# Altium PCB PCB1.PcbDoc
Units mm, origin at the board's own origin, x right, y up, seen from the top; angles counter-clockwise.
Board outline 52.07 x 88.14 mm, 2 copper layers (Top Layer, Bottom Layer); 86 components, 40 nets, 258 pads, 102 vias.
Unrouted connection lines stored in the file: 1.
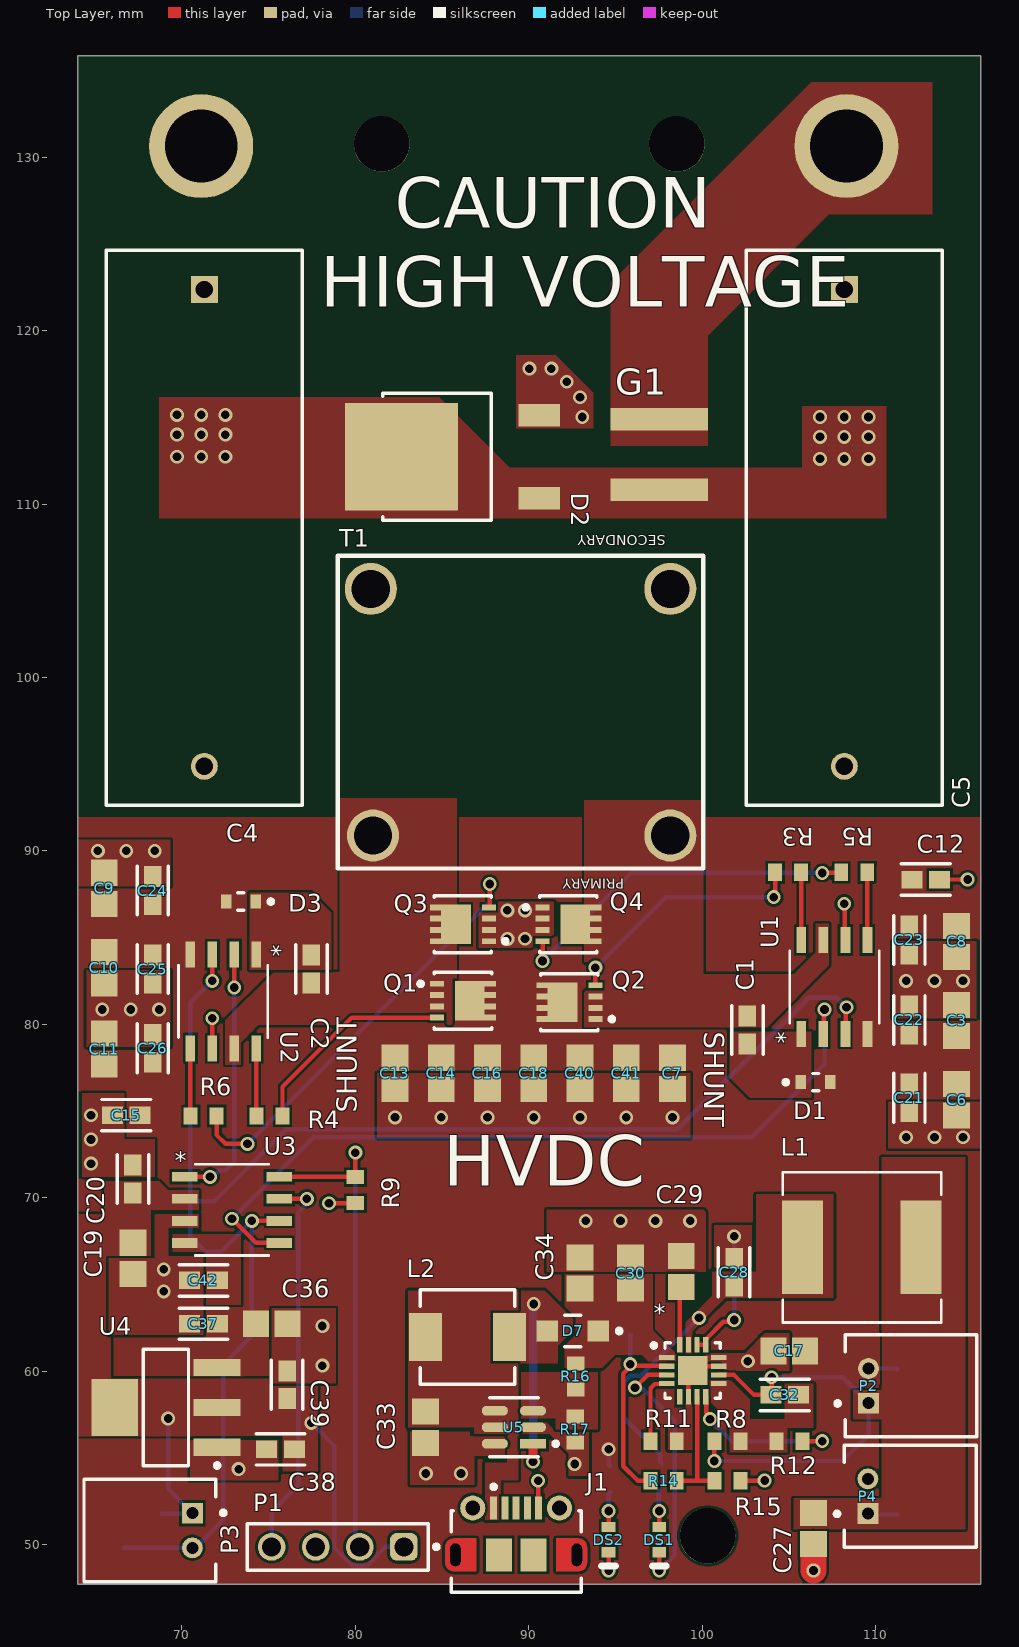
[diagram p0: Top Layer view]
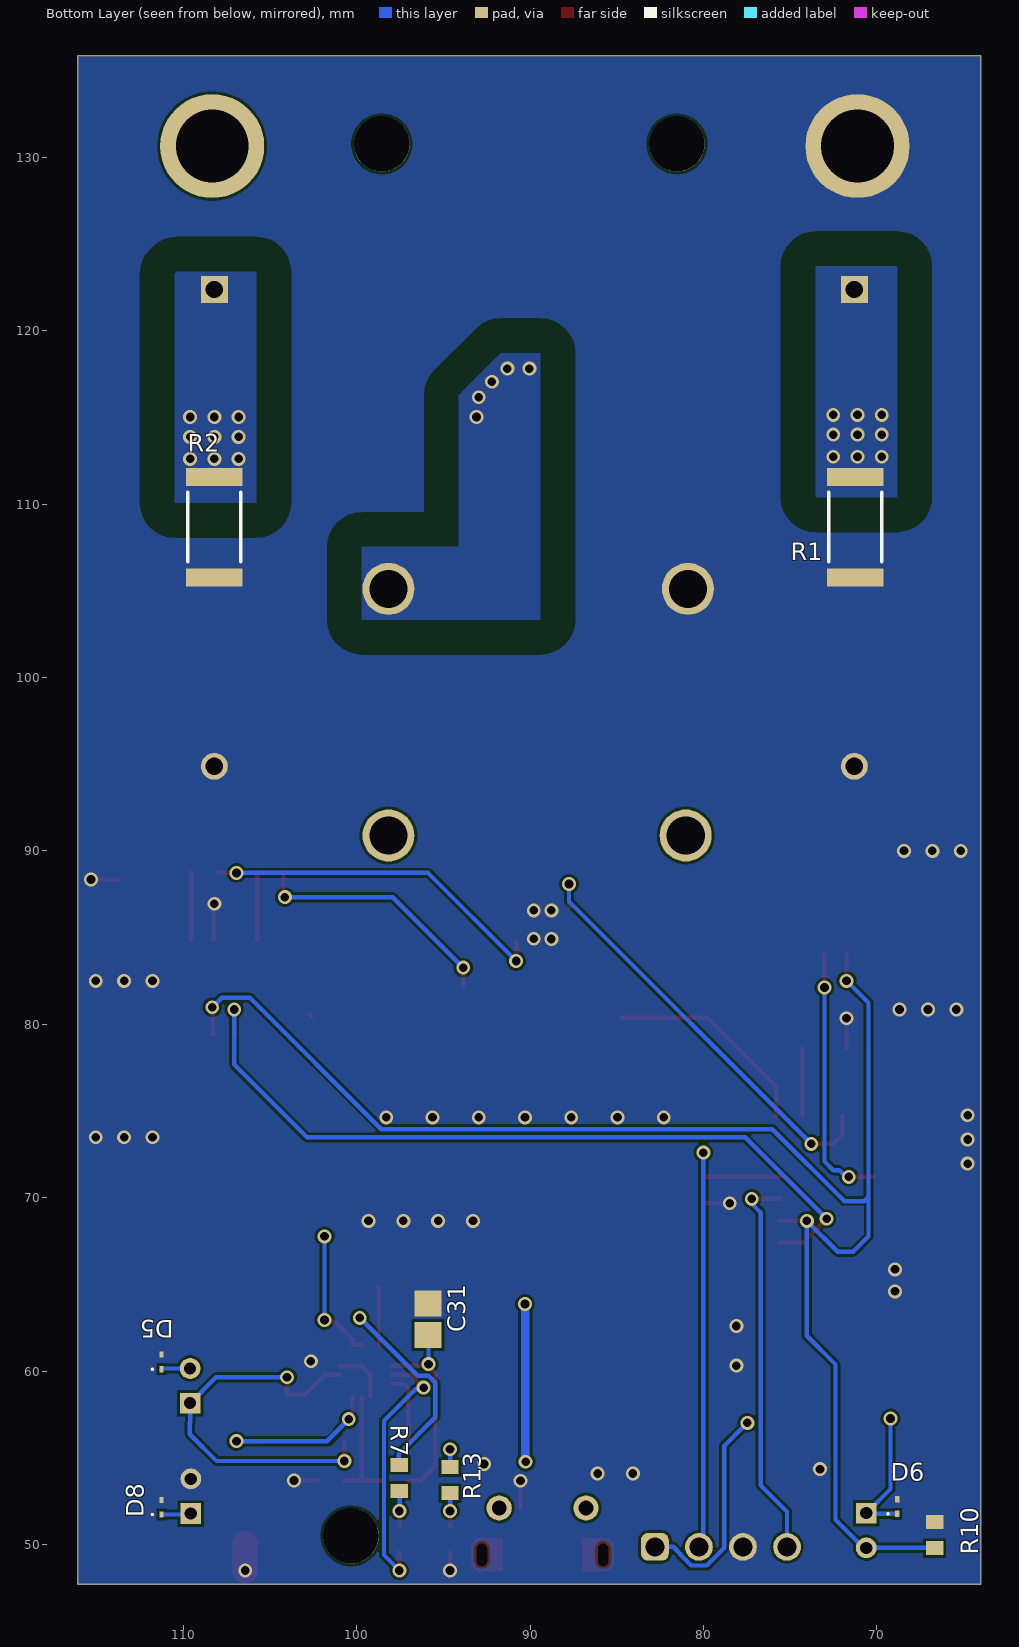
[diagram p1: Bottom Layer view, seen from below]

## Layer stack, top to bottom
Top Solder: solder mask 0.0102, Solder Resist, Dk 3.5
Top Layer: signal copper 0.0356
Dielectric 1: dielectric 0.32, FR-4, Dk 4.8
Bottom Layer: signal copper 0.0356
Bottom Solder: solder mask 0.0102, Solder Resist, Dk 3.5

## Board outline
64.008,47.713 116.078,47.713 116.078,135.851 64.008,135.851

## Design rules (kind name [scope] priority, off if disabled: settings)
Clearance Clearance_2 [InNet('NetC4_1') vs InNet('GND')] p1: gap=0.15 ignorepadtopadclearanceinfootprint=TRUE except(2: Poly-Poly)
Clearance Clearance_1 [InNet('NetD2_2') vs InNet('GND')] p2: gap=0.15 ignorepadtopadclearanceinfootprint=TRUE except(2: Poly-Poly)
Clearance [All] p3: gap=0.15 ignorepadtopadclearanceinfootprint=TRUE
HoleSize [All] p1: absolutevalues=TRUE maxlimit=10 minlimit=0.025 maxpercent=80.000 minpercent=20.000
MinimumSolderMaskSliver [All] p1: minsoldermaskwidth=0.1
PlaneClearance [InNet('NetD2_2')] p1: clearance=2
PlaneConnect [All] p1: planeconnectstyle=Direct reliefexpansion=0.508 reliefentries=4 reliefconductorwidth=0.254 reliefairgap=0.254
PolygonConnect [All] p1: connectstyle=Direct reliefconductorwidth=0.254 reliefentries=4 polygonreliefangle="90 Angle" airgapwidth=0.254
RoutingVias [All] p1: holewidth=0.5 width=0.8 viastyle="Through Hole" minholewidth=0.2 minwidth=0.4 maxholewidth=0.5 maxwidth=0.8
SilkToSolderMaskClearance [IsPad] p1: minsilkscreentomaskgap=0.1 clearancetoexposedcopper=TRUE
SolderMaskExpansion [All] p1: expansion=0 istentingtop=FALSE
SupplyNets "Schematic Supply Nets_5" [InNet('CHG_VBUS')] p1: voltage=0.000
SupplyNets "Schematic Supply Nets_3" [InNet('3V3')] p2: voltage=0.000
SupplyNets "Schematic Supply Nets_4" [InNet('VBAT_CONN')] p3: voltage=0.000
SupplyNets "Schematic Supply Nets_2" [InNet('GND')] p4: voltage=0.000
SupplyNets "Schematic Supply Nets_1" [InNet('VBUS')] p5: voltage=0.000
SupplyNets "Schematic Supply Nets" [InNet('VBAT')] p6: voltage=0.000
Width [All] p1: maxlimit=10 minlimit=0.1 preferedwidth=0.254 minimp=50.000000 maximp=50.000000 favimp=50.000000
25 further rules are at their usual default settings.

## Classes and differential pairs
component class Power: C33 C34 D7 L2 R16 R17 U5
component class STM32: * C19 C20 C27 C28 C29 C30 C31 C32 C36 C37 C38 C39 C42 D5 D6 D8 DS1 DS2 J1 L1 P1 P2 P3 P4 R7 R8 R9 R10 R11 R12 R13 R14 R15 U3 U4
component class "HV Section": C1 C2 C3 C4 C5 C6 C7 C8 C9 C10 C11 C12 C13 C14 C15 C16 C17 C18 C21 C22 C23 C24 C25 C26 C40 C41 D1 D2 D3 G1 Q1 Q2 Q3 Q4 R1 R2 R3 R4 R5 R6 T1 U1 U2

## Components (designator, comment, footprint, x,y, rotation, side; value= is the part's Value field where it differs from the comment)
* "BQ25306RTER" BQ25306RTER 99.465,60.036 r0 top
C1 "100n" FP-GRM188-0_1-e0_2_0_55-IPC_A 102.616,79.677 r90 top
C2 "100n" FP-GRM188-0_1-e0_2_0_55-IPC_A 77.47,83.19 r270 top
C3 "10u" CAPC2013X145X50ML20T25 114.681,80.225 r270 top
C4 "1u" FP-C4AQSBU4100A1WJ-MFG 71.301,108.63 r270 top
C5 "1u" FP-C4AQSBU4100A1WJ-MFG 108.207,108.63 r270 top
C6 "10u" CAPC2013X145X50ML20T25 114.681,75.653 r90 top
C7 "10u" CAPC2013X145X50ML20T25 98.298,77.177 r90 top
C8 "10u" CAPC2013X145X50ML20T25 114.681,84.786 r90 top
C9 "10u" CAPC2013X145X50ML20T25 65.532,87.845 r270 top
C10 "10u" CAPC2013X145X50ML20T25 65.532,83.273 r90 top
C11 "10u" CAPC2013X145X50ML20T25 65.532,78.574 r270 top
C12 "100n" FP-GRM188-0_1-e0_2_0_55-IPC_A 112.903,88.353 r0 top
C13 "10u" CAPC2013X145X50ML20T25 82.296,77.177 r90 top
C14 "10u" CAPC2013X145X50ML20T25 84.963,77.177 r90 top
C15 "100n" FP-GRM188-0_1-e0_2_0_55-IPC_A 66.802,74.764 r180 top
C16 "10u" CAPC2013X145X50ML20T25 87.63,77.177 r90 top
C17 "4u7" CAPC2013X145X50ML20T25 105.029,61.175 r0 top
C18 "10u" CAPC2013X145X50ML20T25 90.297,77.177 r90 top
C19 "4u7" CAPC2013X145X50ML20T25 67.183,66.509 r90 top
C20 "100n" FP-GRM188-0_1-e0_2_0_55-IPC_A 67.183,71.081 r90 top
C21 "100n" FP-GRM188-0_1-e0_2_0_55-IPC_A 111.952,75.773 r270 top
C22 "100n" FP-GRM188-0_1-e0_2_0_55-IPC_A 111.952,80.258 r90 top
C23 "100n" FP-GRM188-0_1-e0_2_0_55-IPC_A 111.952,84.87 r270 top
C24 "100n" FP-GRM188-0_1-e0_2_0_55-IPC_A 68.326,87.718 r90 top
C25 "100n" FP-GRM188-0_1-e0_2_0_55-IPC_A 68.326,83.19 r270 top
C26 "100n" FP-GRM188-0_1-e0_2_0_55-IPC_A 68.326,78.618 r90 top
C27 "10u" CAPC2013X145X50ML20T25 106.426,50.927 r90 top
C28 "100n" FP-GRM188-0_1-e0_2_0_55-IPC_A 101.854,65.707 r90 top
C29 "10u" CAPC2013X145X50ML20T25 98.806,65.758 r270 top
C30 "2u2" CAPC2013X145X50ML20T25 95.885,65.659 r270 top
C31 "2u2" CAPC2013X145X50ML20T25 95.885,62.992 r270 bottom
C32 "470pf" FP-GRM188-0_1-e0_2_0_55-IPC_A 104.775,58.635 r0 top
C33 "1u" CAPC2013X145X50ML20T25 84.062,56.769 r90 top
C34 "10u" CAPC2013X145X50ML20T25 92.964,65.659 r270 top
C36 "10u" CAPC2013X145X50ML20T25 75.184,62.738 r180 top
C37 "100n" FP-GRM188-0_1-e0_2_0_55-IPC_A 71.247,62.738 r180 top
C38 "100n" FP-GRM188-0_1-e0_2_0_55-IPC_A 75.692,55.499 r180 top
C39 "100n" FP-GRM188-0_1-e0_2_0_55-IPC_A 76.073,59.222 r90 top
C40 "10u" CAPC2013X145X50ML20T25 92.964,77.177 r90 top
C41 "10u" CAPC2013X145X50ML20T25 95.631,77.177 r90 top
C42 "100n" FP-GRM188-0_1-e0_2_0_55-IPC_A 71.247,65.239 r180 top
D1 "SD0603S040S0R2" FP-SD0603-MFG 106.553,76.669 r0 top
D2 "C4D08120E" FP-TO-252-2_v2-MFG 84.709,112.737 r90 top
D3 "SD0603S040S0R2" FP-SD0603-MFG 73.406,87.083 r180 top
D5 "ESD9R3.3ST5G" ONSC-SOD-923-2-514AB-01_V 111.252,60.54 r90 bottom
D6 "ESD9R3.3ST5G" ONSC-SOD-923-2-514AB-01_V 68.834,52.197 r90 bottom
D7 "MBR230LSFT1G" FP-498-MFG 92.548,62.322 r180 top
D8 "ESD9R3.3ST5G" ONSC-SOD-923-2-514AB-01_V 111.252,52.158 r90 bottom
DS1 "TLMS1000-GS08" VISH-TLMS1000_V 97.536,50.292 r270 top
DS2 "TLMS1000-GS08" VISH-TLMS1000_V 94.615,50.292 r270 top
G1 "GDT" 2039-110-SM-RPLF 97.536,110.832 r90 top
J1 "105017-0001" USB-MICRO-B_V 89.281,50.761 r0 top
L1 "ETQ-P4M1R0KVK" IND_PCC-M0840M-LP_PAN 109.22,67.144 r180 top
L2 "IHLP2020CZER3R3M11" FP-IHLP-2020CZ-FP_1_905x2-MFG 86.475,61.976 r0 top
P1 "61300411121" 61300411121 78.994,49.872 r180 top
P2 "S2B-PH-K-S(LF)(SN)" JST-S2B-PH-K-S_V 112.051,59.159 r90 top
P3 "S2B-PH-K-S(LF)(SN)" JST-S2B-PH-K-S_V 68.162,50.816 r270 top
P4 "S2B-PH-K-S(LF)(SN)" JST-S2B-PH-K-S_V 112.014,52.793 r90 top
Q1 "BSZ110N06NS3 G" INF-PG-TSDSON-8-21_V 86.219,81.368 r180 top
Q2 "BSZ110N06NS3 G" INF-PG-TSDSON-8-21_V 92.353,81.282 r0 top
Q3 "BSZ110N06NS3 G" INF-PG-TSDSON-8-21_V 86.209,85.771 r0 top
Q4 "BSZ110N06NS3 G" INF-PG-TSDSON-8-21_V 92.291,85.771 r180 top
R1 "1M 3W" RESC2512(6432)_L 71.247,108.673 r90 bottom value="0.00 Ohm"
R2 "1M 3W" RESC2512(6432)_L 108.204,108.673 r90 bottom value="0.00 Ohm"
R3 "10" RESC1608X55X25ML10T15 104.967,88.767 r180 top
R4 "10" RESC1608X55X25ML10T15 75.057,74.721 r0 top
R5 "10" RESC1608X55X25ML10T15 108.777,88.767 r180 top
R6 "10" RESC1608X55X25ML10T15 71.259,74.721 r0 top
R7 "400" RESC1608X55X25ML10T15 97.536,53.848 r90 bottom
R8 "1M33" RESC1608X55X25ML10T15 101.473,55.968 r180 top
R9 "10k" RESC1608X55X25ML10T15 80.01,70.446 r90 top
R10 "10k" RESC1608X55X25ML10T15 66.675,50.546 r90 bottom
R11 "0R" RESC1608X55X25ML10T15 97.79,55.968 r180 top
R12 "200K" RESC1608X55X25ML10T15 105.041,55.968 r180 top
R13 "400" RESC1608X55X25ML10T15 94.615,53.721 r90 bottom
R14 "10k" RESC1608X55X25ML10T15 97.79,53.682 r180 top
R15 "10k" RESC1608X55X25ML10T15 101.473,53.682 r180 top
R16 "1M4" RESC1608X55X25ML10T15 92.71,59.702 r90 top
R17 "121k" RESC1608X55X25ML10T15 92.698,56.642 r90 top
T1 "HV Pulse Transformer" "HV Pulse Transformer Footprint" 89.535,98.005 r180 top
U1 "ADP3110AKRZ-RL" SOIC8_ONS 107.634,82.163 r90 top
U2 "ADP3110AKRZ-RL" SOIC8_ONS 72.39,81.325 r270 top
U3 "STM32C011J6M6" SO-8_STM 72.898,69.303 r0 top
U4 "LD1117AS33TR" SOT-223_M 69.088,57.912 r180 top
U5 "TLV61048DBVR" FP-DBV0006A-IPC_B 89.155,56.769 r180 top

## Footprints (in the part's own frame and the unit in brackets; to place one, negate y for a bottom-side part, rotate by r counter-clockwise, add the part's x,y. Pads: shape width x height; smd on the part's side, far side on the other; paste and mask are expansions set on the pad)
2039-110-SM-RPLF [mm]
  rect 1.3x5.6 smd: 1(0,0) 2(4.064,0)
  body extent -0.47,-2.5 4.53,2.5, height 4.4
61300411121 [mm] "Pin Header, pitch 2.54 mm, THT, Vertical, single row, 4p"
  rrect50% 1.6x1.6 hole 1.1: 1(-3.81,0)
  round 1.6 hole 1.1: 2(-1.27,0) 3(1.27,0) 4(3.81,0)
  silkscreen extent -5.8,-1.35 5.23,1.35, body extent -5.08,-1.27 5.08,1.27, height 8.57
BQ25306RTER [mm] "QFN, 16-Leads, Body 3.00x3.00mm, Pitch 0.50mm, Thermal Pad 1.68x1.50mm, IPC Medium Density"
  rect 0.9x0.3 smd: 1(-1.5,0.75) 2(-1.5,0.25) 3(-1.5,-0.25) 4(-1.5,-0.75) 9(1.5,-0.75) 10(1.5,-0.25) 11(1.5,0.25) 12(1.5,0.75)
  rect 0.3x0.9 smd: 5(-0.75,-1.5) 6(-0.25,-1.5) 7(0.25,-1.5) 8(0.75,-1.5) 13(0.75,1.5) 14(0.25,1.5) 15(-0.25,1.5) 16(-0.75,1.5)
  rect 1.68x1.68 smd: 17(0,0)
  silkscreen extent -2.37,-1.6 1.6,1.6, body extent -1.45,-1.45 1.45,1.45, height 0.8
CAPC2013X145X50ML20T25 [mm] "Chip Capacitor, 2-Leads, Body 2.00x1.25mm, IPC Low Density"
  rect 1.5x1.55 smd: 1(-0.9,0) 2(0.9,0)
  body extent -1.1,-0.72 1.1,0.72, height 1.45
FP-498-MFG [mm]
  rect 1.25x1.22 smd paste+0 mask+0: 1(-1.475,0) 2(1.475,0)
  silkscreen extent -2.8,-0.9 0.48,0.9, body extent -2.2,-1 2.2,1, height 0.25
FP-C4AQSBU4100A1WJ-MFG [mm]
  rect 1.55x1.55 hole 1 paste-2539.97 mask+0: 1(-13.75,0)
  round 1.55 hole 1 paste-2539.97 mask+0: 2(13.75,0)
  silkscreen extent -16,-5.65 16,5.65, body extent -16.1,-5.75 16.1,5.75, height 0.25
FP-DBV0006A-IPC_B [mm]
  rect 1.505x0.57 smd paste+0 mask+0: 1(-1.1,0.95)
  rrect100% 1.505x0.57 smd paste+0 mask+0: 2(-1.1,0) 3(-1.1,-0.95) 4(1.1,-0.95) 5(1.1,0) 6(1.1,0.95)
  silkscreen extent -2.53,-1.7 1.4,1.7, body extent -2.1,-1.7 2.1,1.7, height 0.25
FP-GRM188-0_1-e0_2_0_55-IPC_A [mm]
  rect 1.208x1.012 smd paste+0 mask+0: 1(-0.802,0) 2(0.802,0)
  silkscreen extent -1.41,-0.91 1.41,0.91, body extent -1.91,-1.01 1.91,1.01, height 0.25
FP-IHLP-2020CZ-FP_1_905x2-MFG [mm]
  rect 1.905x2.79 smd paste+0 mask+0: 1(-2.425,0) 2(2.425,0)
  silkscreen extent -2.72,-2.72 2.72,2.72, body extent -3.48,-2.82 3.48,2.82, height 0.25
FP-SD0603-MFG [mm]
  rect 0.6x0.8 smd paste+0 mask+0: 1(-0.85,0) 2(0.85,0)
  silkscreen extent -1.85,-0.5 0.18,0.5, body extent -1.25,-0.6 1.25,0.6, height 0.25
FP-TO-252-2_v2-MFG [mm]
  rect 1.3x2.4 smd paste+0 mask+0: 1(-2.39,-5.908) 2(2.39,-5.908)
  rect 6.2x6.5 smd paste+0 mask+0: 3(0,2.042)
  silkscreen extent -3.67,-3.12 3.67,3.12, body extent -3.77,-7.21 3.77,5.39, height 0.25
"HV Pulse Transformer Footprint" [mm]
  round 3 hole 2.2: 1(-8.636,7.112) 2(8.509,7.112) 3(-8.636,-7.112) 4(8.636,-7.112)
  silkscreen extent -10.54,-9.02 10.54,9.02
IND_PCC-M0840M-LP_PAN [mil]
  rect 93x212 smd paste+0 mask+0: 1(-134.5,0) 2(134.5,0)
  silkscreen extent -180,-171 180,171, body extent -175,-166 175,166, height 177
INF-PG-TSDSON-8-21_V [mm] "SON, 8-Leads, Body 3.3x3.3mm, Pitch 0.65mm"
  rect 0.8x0.34 smd: 1(1.5,-0.975) 2(1.5,-0.325) 3(1.5,0.325) 4(1.5,0.975)
  rect 0.65x0.34 smd: 5(-1.575,0.975) 6(-1.575,0.325) 7(-1.575,-0.325) 8(-1.575,-0.975)
  rect 1.71x2.29 smd: ""(-0.395,0)
  silkscreen extent -1.65,-1.65 2.57,1.65, body extent -1.65,-1.65 1.65,1.65, height 1
JST-S2B-PH-K-S_V [mm] "THD, 2-Leads, Body 7.6x5.9mm, Pitch 2mm"
  rect 1.2x1.2 hole 0.7: 1(-1,2.45)
  round 1.2 hole 0.7: 2(1,2.45)
  silkscreen extent -2.95,-3.8 2.95,4.35, body extent -2.95,-3.8 2.95,3.8, height 4.8
ONSC-SOD-923-2-514AB-01_V [mm] "SOD, 2-Leads, Body 0.8x0.6mm"
  rect 0.36x0.25 smd: 1(-0.42,0) 2(0.42,0)
  silkscreen extent -0.47,0.48 -0.37,0.58, body extent -0.4,-0.3 0.4,0.3, height 0.4
RESC1608X55X25ML10T15 [mm] "Chip Resistor, 2-Leads, Body 1.60x0.80mm, IPC Low Density"
  rect 0.8x1 smd: 1(-0.75,0) 2(0.75,0)
  body extent -0.85,-0.45 0.85,0.45, height 0.55
RESC2512(6432)_L [mm] "Chip Resistor, Body 6.4x3.2mm, IPC High Density"
  rect 1.05x3.25 smd: 1(-2.9,0) 2(2.9,0)
  silkscreen extent -2,-1.52 2,1.53, body extent -3.25,-1.7 3.25,1.7, height 0.75
SO-8_STM [mil]
  rect 57.5x22 smd paste+0 mask+0: 1(-107.25,75) 2(-107.25,25) 3(-107.25,-25) 4(-107.25,-75) 5(107.25,-75) 6(107.25,-25) 7(107.25,25) 8(107.25,75)
  silkscreen extent -84,-103 84,104, body extent -122,-99 122,99, height 69
SOIC8_ONS [mil]
  rect 59x22 smd paste+0 mask+0: 1(-106.5,75) 2(-106.5,25) 3(-106.5,-25) 4(-106.5,-75) 5(106.5,-75) 6(106.5,-25) 7(106.5,25) 8(106.5,75)
  silkscreen extent -82,-102 82,101, body extent -122,-96 122,96, height 69
SOT-223_M [mm] "SOT223, 4-Leads, Body 6.5x3.5mm, Pitch 2.3mm, Lead Span 7mm, IPC Low Density"
  rect 2.7x1 smd: 1(-2.95,2.3) 2(-2.95,0) 3(-2.95,-2.3)
  rect 2.7x3.3 smd: 4(2.95,0)
  silkscreen extent -3.08,-3.35 1.3,3.47, body extent -1.85,-3.35 1.85,3.35, height 1.8
USB-MICRO-B_V [mm] "USB, MICRO B, Body 7.491x4.695 mm, Pitch 0.65 mm"
  rect 0.4x1.35 smd: 1(-1.3,1.35) 2(-0.65,1.35) 3(0,1.35) 4(0.65,1.35) 5(1.3,1.35)
  round 1.45 hole 0.85: 6(-2.5,1.35) 7(2.5,1.35)
  rrect50% 0x0 hole 0.6 slot 1.3 at 90 deg: 8(-3.5,-1.35) 11(3.5,-1.35)
  rect 1.5x1.9 smd: 9(-1,-1.35) 10(1,-1.35)
  Top Layer circle w0.5: c-3.6,-1.8 r0.25
  Top Layer circle w0.5: c-3.6,-0.9 r0.25
  Top Layer circle w0.5: c3.6,-1.8 r0.25
  Top Layer circle w0.5: c3.6,-0.9 r0.25
  Top Layer region: -3.6,-1.8 -3.6,-0.9 -4.1,-0.9 -4.1,-1.8
  Top Layer region: 3.6,-0.9 3.6,-1.8 4.1,-1.8 4.1,-0.9
  Top Layer region: 2.3,-0.4 2.3,-2.3 3.6,-2.3 3.6,-0.4
  Top Layer region: -2.3,-2.3 -2.3,-0.4 -3.6,-0.4 -3.6,-2.3
  silkscreen extent -3.75,-3.5 3.75,2.7, body extent -4.1,-3.9 4.1,1.5, height 2.67
VISH-TLMS1000_V [mm] "SMD, 2-Leads, Body 0.8x1.6mm"
  rect 0.6x0.8 smd: 1(-0.725,0) 2(0.725,0)
  silkscreen extent 1.52,-0.4 1.52,0.4, body extent -0.8,-0.4 0.8,0.4, height 0.65

## Part data
C1 C2 C12 C15 C20 C21 C22 C23 C24 C25 C26 C28 C32 C37 C38 C39 C42: library part CMP-2006-02792-2, "Chip Multilayer Ceramic Capacitors for General Purpose, 0603, 10uF, X5R, 15%, 20%, 6.3V", Capacitance=10uF, Case Code (Imperial)=0603, Case Code (Metric)=1608, Dielectric=X5R, Max Operating Temperature=85°C, Min Operating Temperature=-55°C, Package Quantity=4000, Tolerance=20%, Voltage=6.3V, Case/Package=0603, Depth=0.8mm, Height=0.8mm, Lead Free="Lead Free", Length=1.6mm, Material=Ceramic, Mount="Surface Mount", Packaging="Tape and Reel", Radiation Hardening=No, REACH SVHC="No SVHC", Termination=SMD/SMT, Thickness=0.035inch, Voltage Rating=6.3V, Voltage Rating (DC)=6.3V, Width=0.031inch
C3 C6 C7 C8 C9 C10 C11 C13 C14 C16 C17 C18 C19 C27 C29 C30 C31 C33 C34 C36 C40 C41: library part CMP-1036-04819-2, Manufacturer=Kemet, Part Number=C0805C225K9PACTU
C4 C5: library part CMP-00212-89953900-1, "C4AQSBU4100A1WJ Cap Film 1uF 1500V Polypropylene 5% Molded 27.5mm 105°C", Capacitance=1µF, Case/Package=Radial, Max Operating Temperature=105°C, Min Operating Temperature=-55°C, Tolerance=5%, Voltage Rating=1.5kV, Voltage Rating (DC)=1.5V, Height=20.2mm, NexarPartId=89953900, Schedule B=8532250070
D1 D3: library part CMP-04549-000001-1, "DIODE SCHOTTKY 40V 200MA 0603", Forward Current=0.2A, Manufacturer=AVX, Max Repetitive Reverse Voltage=40V, Max Surge Forward Current=2A, Package=SD0603, Temperature="-55°C to +125°C", Temperature Range High=+125°C, Temperature Range Low=-55°C, Automotive=No, Category=Diode, ComponentLink2Description=Datasheet, ComponentLink2URL=http://datasheets.avx.com/schottky.pdf, Device Class L1="Discrete Semiconductors", Device Class L2=Diodes, Device Class L3="Schottky Diodes", Digikey Description="DIODE SCHOTTKY 40V 200MA 0603", Height=0.86mm, Lead Free=Yes, Manufacturer Part Number=SD0603S040S0R2, Mouser Description="Schottky Diodes & Rectifiers 40volts 0.2A SIZE 0603", Octopart=https://octopart.com/sd0603s040s0r2-avx-24931763, Reverse Voltage=40V, RoHS=TRUE
D2: library part CMP-240925-000081-2, "DIODE SCHOTTKY 1.2KV 8A TO252-2", Average Rectified Current=24.5A, Case/Package=TO-252, Forward Voltage=1.8V, Max Forward Surge Current (Ifsm)=64A, Max Operating Temperature=175°C, Max Power Dissipation=136W, Max Repetitive Reverse Voltage (Vrrm)=1.2kV, Max Reverse Leakage Current=35uA, Min Operating Temperature=-55°C, Package Quantity=75, Element Configuration=Single, Forward Current=24.5A, Max Reverse Voltage (DC)=1.2kV, Max Surge Current=64A, Mount="Surface Mount", Number of Pins=3, Packaging=Rail/Tube, Peak Non-Repetitive Surge Current=64A, Reverse Recovery Time=0ns, RoHS Compliant=Yes, Series=Z-Rec®
D5 D6 D8: library part CMP-1063-00117-1, "Transient Voltage Suppressor, ESD Protection Diode with Ultra-Low Leakage, 2-Pin SOD-923, Pb-Free, Tape and Reel", Manufacturer="On Semiconductor", C Max (pF)=0.9, ComponentLink1Description="Manufacturer URL", ComponentLink1URL=http://www.onsemi.com/, ComponentLink2Description=Datasheet, ComponentLink2URL=http://www.onsemi.com/pub_link/Collateral/ESD9R3.3S-D.PDF, ComponentLink3Description="Package Specification", ComponentLink3URL=http://www.onsemi.com/pub_link/Collateral/514AB.PDF, DatasheetVersion="Rev. 1", Direction=Unidirectional, IR Max (uA)=0.001, Mounting Technology="Surface Mount", Number of Lines=1, PackageDescription="2-Pin SOD, Body 0.8 x 0.6 mm", PackageReference=SOD-923-2-514AB-01, PackageVersion="Rev. C, 03/2011", Packing="Tape and Reel", PartNumber=ESD9R3.3ST5G, RoHS=Pb-Free, V(BR) Min (V)=4.8, VRWM Max (V)=3.3
D7: library part CMP-1055-00442-2, "DIODE SCHOTTKY 30V 2A SOD123L", Average Rectified Current=2A, Case/Package=SOD, Forward Voltage=430mV, Max Forward Surge Current (Ifsm)=40A, Max Operating Temperature=125°C, Max Repetitive Reverse Voltage (Vrrm)=30V, Min Operating Temperature=-55°C, Package Quantity=1, Peak Reverse Current=1mA, Contact Plating=Tin, Element Configuration=Single, Forward Current=2A, Halogen Free="Halogen Free", Height=0.9mm, Lead Free="Lead Free", Length=2.9mm, Max Reverse Voltage (DC)=30V, Number of Pins=2, Packaging="Tape and Reel", Peak Non-Repetitive Surge Current=40A, Radiation Hardening=No, REACH SVHC="No SVHC", Width=1.8mm
DS1 DS2: library part CMP-2000-07254-1, "Low Current LED, 40 mW, 1.8 V, -40 to 100 degC, 2-Pin SMD (0603), RoHS, Tape and Reel", Forward Current If=2mA, Forward Voltage=1.8V, LED Colour=Red, Manufacturer=Vishay, Package Description="2-Pin Surface Mount Device, Body 1.6 x 0.8 mm", Package Reference=TLMS1000, Automotive Qualification Standard=AEC-Q100, Bulb Size=1.6mmx0.8mm, Datasheet URL=https://datasheet.ciiva.com/5798/1698881-5798337.pdf, Datasheet Version="Rev. 1.7, 02/2011", LED Mounting=SMD, Lens Shape=Rectangular, Luminous Intensity=4mcd, Manufacturer URL=http://www.vishay.com/, Mounting Technology=SurfaceMount, MSL=MSL2-1year, Packaging=CutTape, Product Range=-, SVHC=ToBeAdvised, Viewing Angle=80°, Wavelength Typ=636nm
J1: library part CMP-2000-05827-1, "Micro-USB B Receptacle, Right Angle, Bottom Mount, Surface Mount, with Solder Tabs, -30 to 85 degC, 5-Pin USB, RoHS, Tape and Reel", Manufacturer=Molex, Package Description="5-Leads USB, Micro B, Body 7.5 x 5 mm, Pitch 0.65 mm", Package Reference=MICRO-B, Package Version="Rev. F, 12/2012", Standard Package=1, Voltage - Max=30V, 3D Model=105017-0001.stp, Catalog Drawings=1050170001, Category=Connectors,Interconnects, Circuits=5, Connector Type=USB-microB, Datasheet URL=http://www.molex.com/elqNow/elqRedir.htm?ref=http://www.molex.com/webdocs/datasheets/pdf/en-us/1050170001_IO_CONNECTORS.pdf, Datasheet Version=03/2016, Family=USB,DVI,HDMIConnectors, Featured Product=Micro-USBConnectorsUSBConnectors, Features=Shielded,SolderRetention, Gender=Receptacle, Ingress Protection=-, Manufacturer URL=http://www.molex.com/, Mating Products=WM17145-ND-CABLEMICROUSBBTOSTDA1.0MWM17147-ND-CABLEMICROUSBBTOSTDA2.0MWM17146-ND-CABLEMICROUSBBTOSTDA1.5M, Mounting Technology=SurfaceMount, Mounting Type=BoardCutout,SurfaceMount,RightAngle, Number of Contacts=5, Online Catalog=Molex-MicroUSB, Other Names=WM1399DKR, Package URL=http://www.molex.com/pdm_docs/sd/1050170001_sd.pdf, Packaging=Digi-Reel®, PCN Assembly/Origin=ResinSupplier21/Oct/2015, RoHS Information=1050170001CertofCompliance, Series=-, Specifications=-
L1: "No Description Available", Mfr_Name=Panasonic
L2: library part CMP-02424-000463-1, "Fixed Inductors Commercial Low DCR Series 3.3uH 5.5A 40.4mΩ 20%", Case/Package=2020, Current Rating=5.5A, DC Resistance (DCR)=40.4mR, Inductance=3.3uH, Inductance Tolerance=20%, Max DC Current=7A, Max Operating Temperature=125°C, Min Operating Temperature=-55°C, Package Quantity=2000, Self Resonant Frequency=29MHz, Test Frequency=100kHz, Contact Plating=Tin, Depth=5.43mm, Height=3mm, Height - Seated (Max)=0.118inch, Lead Free="Lead Free", Length=5.74mm, Military Standard=Not, Mount="Surface Mount", Packaging="Tape and Reel", Radiation Hardening=No, RMS Current (Irms)=5.5A, Saturation Current=7A, Shielding=Shielded, Termination=SMD/SMT, Tolerance=20%, Width=0.204inch
P1: library part CMP-1502-01064-3, Color=Black, Contact Resistance=20mΩ, Current Rating=3A, Max Operating Temperature=105°C, Min Operating Temperature=-40°C, Operating Supply Voltage=250V, Connector Type="Male Pin", Contact Material=Copper, Contact Mating Length=5.9944mm, Contact Plating=Gold, Gender=Male, Height=8.89mm, Lead Free="Lead Free", Lead Pitch=2.54mm, Mount="Through Hole", NexarPartId=32855522, Number of Contacts=4, Number of Pins=4, Number of Positions=4, Number of Rows=1, Orientation=Vertical, Packaging=Bulk, Pitch=2.54mm, REACH SVHC=Unknown, RoHS=Compliant, Termination=Solder, Voltage Rating=250V
P2 P3 P4: library part CMP-1755-00004-1, "Male Header, Pitch 2 mm, 1 x 2 Position, Height 4.8 mm, Tail Length 3.4 mm, -25 to 85 degC, RoHS, Bulk", Capacitance="10 uF", Case\Package=Radial, Max Operating Temperature="85 degC", Min Operating Temperature="-40 degC", Package Quantity=200, Tolerance=20%, Voltage Rating="50 V", ComponentLink1Description=Datasheet, ComponentLink1URL=http://www.jst-mfg.com/product/pdf/eng/ePH.pdf, DatasheetVersion=Dec-12, Diameter="5 mm", Height="11 mm", Lead Pitch="2 mm", Length="11 mm", Mount="Through Hole", PackageDescription="Male Header, Pitch 2 mm, 1 x 2 Position, Height 4.8 mm, Tail Length 3.4 mm", PackageReference=S2B-PH-K-S, Packaging=Bulk, Pins=2, Radiation Hardening=No, REACH SVHC="No SVHC", RoHSCompliant=true, Voltage Rating (DC)="50 V"
Q1 Q2 Q3 Q4: library part CMP-1091-00315-1, "N-Channel OptiMOS 3 Power-Transistor, 60 V VDS, 20 A ID, -55 to 150 degC, PG-TSDSON-8-21, Reel, Green", Manufacturer=Infineon, ComponentLink1Description="Manufacturer URL", ComponentLink1URL=http://www.infineon.com/, ComponentLink2Description=Datasheet, ComponentLink2URL=http://www.infineon.com/dgdl/BSZ110N06NS3_Rev2.4.pdf?folderId=db3a30431ddc9372011ebafa04517f8b&fileId=db3a30431ddc9372011ebb15d4e8001a, ComponentLink3Description="Package Specification", ComponentLink3URL=http://www.infineon.com/dgdl/BSZ110N06NS3_Rev2.4.pdf?folderId=db3a30431ddc9372011ebafa04517f8b&fileId=db3a30431ddc9372011ebb15d4e8001a, DatasheetVersion="Rev. 2.4", Green=TRUE, Halogen-free=TRUE, ID (max)="20Â A", IDpuls (max)="80Â A", Mounting Technology="Surface Mount", PackageDescription="8-Pin Plastic (Green) Small Outline Non-Leaded Package, 3.3 x 3.3 mm Body, 0.65 mm Pitch", PackageReference=PG-TSDSON-8-21, PackageVersion="Rev. 01, 03/2007", Packing=Reel, PartNumber="BSZ110N06NS3 G", Polarity=N, Ptot (max)="50Â W", QG="25Â nC", RDS (on) (max)="11Â mOhm", Rth="2.5Â K/W", RthJA (max)="60 K/W", RthJC (max)="2.5Â K/W", VDS (max)="60Â V", VGS(th) (max)="4Â V", VGS(th) (min)="2Â V"
R1 R2: library part CMP-1018-00001-1, "Jumper 2512 (6432 Metric)", Case-EIA=2512, Case-Metric=6432, Power=None, Technology=SMT, Tolerance=None
R3 R4 R5 R6 R7 R8 R9 R10 R11 R12 R13 R14 R15 R16 R17: library part CMP-2100-03667-1, "Chip Resistor, 0 Ohm, +/- 5%, 0.1 W, -55 to 155 degC, 0603 (1608 Metric), RoHS, Tape and Reel", Case Code (Imperial)=0603, Case Code (Metric)=1608, Manufacturer=Yageo, Max Operating Temperature=155degC, Min Operating Temperature=-55degC, Package Description="2-Pin Surface Mount Device, Body 1.6 x 0.8 mm", Package Quantity=5000, Power Rating=100mW, Resistance=0mOhm, Temperature Coefficient=200ppm/degreesC, Tolerance=5%, Voltage Rating=50V, Case/Package=0603, Composition=ThickFilm, Contact Plating=Tin, Datasheet URL=http://www.yageo.com/NewPortal/yageodocoutput?fileName=/pdf/R-Chip/PYu-RC_Group_51_RoHS_L_5.pdf, Datasheet Version="Rev. 5, 10/2016", Depth=0.8mm, Height=0.45mm, Lead Free=LeadFree, Length=1.6mm, Manufacturer URL=http://www.yageo.com/, Military Standard=Not, Number of Pins=2, Package Reference=0603, Packaging=TapeandReel, Radiation Hardening=No, REACH SVHC=NoSVHC, RoHSCompliant=true, Termination=SMD/SMT, Voltage Rating (DC)=50V, Width=0.8mm
U1 U2: "No Description Available", Mfr_Name=onsemi, RefDes=RefDes, Type=Type
U3: "No Description Available", Mfr_Name=STMicroelectronics, RefDes=RefDes, Type=Type
U4: library part CMP-0244-00316-1, "1A, Low Drop Positive Voltage Regulator, 3.3V, 4-Pin SOT-223, Tape and Reel", ComponentLink1Description="Manufacturer URL", ComponentLink1URL=http://www.st.com, ComponentLink2Description=Datasheet, ComponentLink2URL=http://www.st.com/internet/com/TECHNICAL_RESOURCES/TECHNICAL_LITERATURE/DATASHEET/CD00002116.pdf, DatasheetVersion=2/12/2011, PackageDescription="4-Pin SOT-223 Package, 6.5 x 3.5 mm Body, 2.3 mm Pitch, 7 mm Lead Span", PackageReference=SOT-223, PackageVersion=2010
U5: library part CMP-04918-000262-1, "IC REG BOOST ADJ SOT23-6"

## Free pads (board coordinates)
  round 6 hole 4.2: 3(71.12,130.644) 3(108.331,130.644)
  round 3.2 hole 3.2: 3(81.534,130.771) 3(98.552,130.771) 3(100.33,50.507)

## Via types
v1: diameter 0.8, hole 0.5, Top Layer to Bottom Layer, 102 vias

## Nets (pads, with @x,y where several pads share a name; then routed paths per layer and width w, separated by ;. In a path a pad name is that pad's centre, name@x,y a point inside that pad or via, vN(x,y) a via of type N, cw(c..) or ccw(c..) an arc to the next point about the centre after c; other vN are vias at no path point)
3V3: C19.2 C20.1 C38.1 C39.1 D6.1 P1.1 P3.1 U3.2 U4.2 U4.4 | length 20.5
  Bottom Layer w0.254: D6.1 70.573,51.777 P3.1 69.215,53.213 v1(69.215,57.277) ; v1(77.47,57.023) 78.801,55.692 78.801,49.812 79.818,48.795 80.71,48.795 81.341,49.426 81.341,49.464 81.749,49.872 P1.1
CAP+: G1.2 pad.3@108.331,130.644
CHG_VBUS: *.1 C30.2 C34.2 D7.1 R16.2
GND: *.6 *.11 *.12 *.17 C3.1 C4.2 C5.2 C6.1 C7.1 C8.1 C9.1 C10.1 C11.1 C12.2 C13.1 C14.1 C15.2 C16.1 C17.1 C18.1 C19.1 C20.2 C21.2 C22.2 C23.2 C24.2 C25.2 C26.2 C27.1 C29.1 C30.1 C31.1 C33.1 C34.1 C36.1 C37.2 C38.2 C39.2 C40.1 C41.1 C42.2 D5.2 D6.2 D8.2 DS2.2 J1.5 P1.3 P4.2 pad.3@71.12,130.644 Q3.1 Q3.2 Q3.3 Q4.1 Q4.2 Q4.3 R1.1 R2.1 R9.1 R10.2 R11.1 R15.1 R17.1 T1.4 U1.6 U2.6 U3.3 U4.1 U5.2 U5.6 | length 15.8
  Top Layer w0.254: U2.6 v1(71.755,80.352) ; v1(78.486,69.684) 79.998,69.684 R9.1 ; v1(90.551,53.682) 90.566,53.667 90.566,52.126 J1.5 ; v1(94.615,48.514) DS2.2 ; *.6 99.215,59.786 *.17 99.715,60.286 *.11 ; R15.1 103.593,53.682 v1@103.632,53.721 ; v1(108.204,86.956) 108.236,86.924 108.236,84.901 U1.6 ; C12.2 v1(115.316,88.353)
  Top Layer w1.5: v1(106.426,48.514) C27.1
  other v1: 103.613,53.702 84.074,54.102 86.106,54.102 73.279,54.356 92.655,54.648 78.105,60.325 102.644,60.574 78.105,62.611 68.961,64.604 68.961,65.874 93.294,68.668 95.301,68.668 97.307,68.668 99.314,68.668 64.77,71.97 64.77,73.367 111.773,73.494 113.411,73.494 115.049,73.494 82.296,74.637 84.963,74.637 87.63,74.637 90.297,74.637 92.964,74.637 95.631,74.637 98.298,74.637 64.77,74.764 65.418,80.86 67.056,80.86 68.694,80.86 111.773,82.511 113.411,82.511 115.049,82.511 88.773,84.924 89.789,84.937 88.773,86.575 89.789,86.575 65.164,90.004 66.802,90.004 68.44,90.004
Net*_3: *.3 DS1.2 | length 15.3
  Top Layer w0.254: v1(96.139,59.055) 96.87,59.786 *.3 ; v1(97.536,48.514) DS1.2
  Bottom Layer w0.254: v1(96.139,59.055) 96.243,58.951 96.624,58.951 98.425,57.15 98.425,49.403 v1(97.536,48.514)
Net*_4: *.4 R11.2 | length 4.1
  Top Layer w0.254: R11.2 97.028,55.98 97.028,59.016 97.275,59.263 97.942,59.263 *.4
Net*_7: *.7 R14.1 R15.2 | length 7
  Top Layer w0.254: R14.1 99.715,53.682 ; *.7 99.715,53.682 ; R15.2 99.715,53.682
Net*_8: *.8 R12.1 | length 9.5
  Top Layer w0.254: *.8 100.238,58.513 100.238,57.605 100.457,57.386 v1(100.457,57.238) ; R12.1 v1(106.934,55.968)
  Bottom Layer w0.254: v1(100.457,57.238) 101.727,55.968 v1(106.934,55.968)
Net*_9: *.9 C32.2 R8.1 R12.2
Net*_13: *.13 *.14 C28.2 | length 7.7
  Top Layer w0.254: *.14 *.13 100.215,61.836 101.228,62.849 101.75,62.849 v1(101.854,62.953)
  Bottom Layer w0.254: v1(101.854,62.953) v1(101.854,67.779)
Net*_15: *.15 C28.1 L1.2 R7.2 | length 11.5
  Bottom Layer w0.254: R7.2@97.663,54.674 97.581,54.756 97.581,55.23 95.462,57.349 95.462,59.335 95.859,59.732 96.474,59.732 v1(99.822,63.08)
Net*_16: *.16 C29.2 | length 3.4
  Top Layer w0.254: *.16 98.715,64.767 C29.2
NetC1_1: C1.1 D1.1 U1.1
NetC2_1: C2.1 D3.1 U2.1
NetC4_1: C4.1 C5.1 D2.1 D2.3 G1.1 R1.2 R2.2
  other v1: 106.807,112.61 108.204,112.61 109.601,112.61 69.723,112.737 71.12,112.737 72.517,112.737 106.807,113.88 108.204,113.88 109.601,113.88 69.723,114.007 71.12,114.007 72.517,114.007 106.807,115.023 108.204,115.023 109.601,115.023 69.723,115.15 71.12,115.15 72.517,115.15
NetC42_1: C42.1 U3.4
NetD2_2: D2.2 T1.3 | length 0.3
  Top Layer w2: T1.3@97.98,105.308 T1.3
  other v1: 93.091,115.023 92.964,116.166 92.202,117.055 90.043,117.817 91.313,117.817
NetD7_2: D7.2 L2.2 U5.1 | length 10.2
  Top Layer w0.5: v1(90.255,54.779) U5.1
  Bottom Layer w0.5: v1(90.255,54.779) 90.276,54.799 90.276,63.86 v1(90.297,63.881)
NetDS1_1: DS1.1 R7.1 | length 2.1
  Top Layer w0.254: DS1.1 v1(97.536,51.943)
  Bottom Layer w0.254: v1@97.51,51.982 97.51,53.072 R7.1
NetDS2_1: DS2.1 R13.1 | length 2.1
  Top Layer w0.254: DS2.1 v1(94.615,51.943)
  Bottom Layer w0.254: v1(94.615,51.943) 94.615,52.931 R13.1@94.715,53.031
NetQ1_4: Q1.4 R4.2 | length 12.2
  Top Layer w0.254: R4.2 75.807,76.403 79.797,80.393 Q1.4
NetQ2_4: Q2.4 R3.2 | length 14.4
  Top Layer w0.254: Q2.4 v1(93.853,83.273) ; v1(104.14,87.337) 104.217,87.414 R3.2
  Bottom Layer w0.254: v1(93.853,83.273) 97.917,87.337 v1(104.14,87.337)
NetQ3_4: Q3.4 R6.2 | length 25.2
  Top Layer w0.254: R6.2 72.009,73.621 72.517,73.113 v1(73.787,73.113) ; Q3.4 87.714,86.746 87.757,86.789 v1(87.757,88.099)
  Bottom Layer w0.254: v1(73.787,73.113) 87.757,87.083 v1(87.757,88.099)
NetQ4_4: Q4.4 R5.2 | length 20.5
  Top Layer w0.254: Q4.4 90.805,84.782 v1(90.805,83.654) ; v1(106.934,88.734) 107.993,88.734 R5.2
  Bottom Layer w0.254: v1(90.805,83.654) 95.885,88.734 v1(106.934,88.734)
NetR3_1: R3.1 U1.8 | length 3.9
  Top Layer w0.254: R3.1 105.729,88.755 U1.8
NetR4_1: R4.1 U2.8 | length 3.9
  Top Layer w0.254: U2.8 74.295,74.733 R4.1
NetR5_1: R5.1 U1.5 | length 3.9
  Top Layer w0.254: R5.1 109.539,88.755 U1.5
NetR6_1: R6.1 U2.5 | length 3.9
  Top Layer w0.254: U2.5 70.485,74.745 R6.1
NetR16_1: R16.1 R17.2 U5.3
ON_BTN: P3.2 R10.1 U1.3 U2.3 U3.6 | length 91.9
  Top Layer w0.254: v1(71.755,82.511) U2.3 ; v1(74.041,68.668) U3.6 ; U1.3 108.3,79.489 108.3,80.956 v1(108.331,80.987)
  Bottom Layer w0.254: R10.1 66.695,49.816 P3.2 70.771,49.816 72.39,51.435 72.39,60.392 74.041,62.043 v1(74.041,68.668) 72.263,66.89 71.374,66.89 70.485,67.779 70.485,70.065 ; v1(71.755,82.511) 70.485,81.241 70.485,70.065 ; v1(108.331,80.987) 108.327,80.987 107.777,81.537 106.155,81.537 98.578,73.96 76.031,73.96 71.882,69.811 70.739,69.811 70.485,70.065
PRIMARY_H: C2.2 Q1.1 Q1.2 Q1.3 Q3. Q3.5 Q3.6 Q3.7 Q3.8 T1.2 U2.7
PRIMARY_L: C1.2 Q2.1 Q2.2 Q2.3 Q4. Q4.5 Q4.6 Q4.7 Q4.8 T1.1 U1.7 | length 0.1
  Top Layer w0.254: C1.2 C1.2@102.714,80.577
PWMH: U2.2 U3.1 | length 15.2
  Top Layer w0.254: U3.1 v1(71.628,71.208) ; v1(73.025,82.13) U2.2
  Bottom Layer w0.254: v1(71.628,71.208) 71.776,71.208 72.164,71.596 72.524,71.596 73.025,72.097 v1(73.025,82.13)
PWML: U1.2 U3.5 | length 45.8
  Top Layer w0.254: v1(72.898,68.795) 74.295,67.398 U3.5 ; U1.2 107.03,79.489 107.03,80.829 v1(107.061,80.86)
  Bottom Layer w0.254: v1(72.898,68.795) 77.597,73.494 102.87,73.494 107.061,77.685 v1(107.061,80.86)
REGN: *.2 C31.2 R14.2 | length 11.8
  Top Layer w0.254: v1(95.859,60.409) 95.859,60.261 95.462,59.865 95.462,54.525 96.305,53.682 R14.2 ; v1@95.885,60.306 97.946,60.306 *.2
  Bottom Layer w0.254: v1(95.859,60.409) 95.859,62.066 C31.2
SWCLK: P1.2 R9.2 U3.8 | length 28.6
  Top Layer w0.254: U3.8 79.998,71.208 R9.2 v1(80.01,72.605)
  Bottom Layer w0.254: v1(80.01,72.605) 80.01,50.126 P1.2
SWDIO: P1.4 U3.7 | length 22.5
  Top Layer w0.254: U3.7 v1(77.216,69.938)
  Bottom Layer w0.254: P1.4 75.184,51.904 76.708,53.428 76.708,69.158 77.112,69.562 77.112,69.834 v1(77.216,69.938)
VBAT: C3.2 C6.2 C7.2 C8.2 C9.2 C10.2 C11.2 C12.1 C13.2 C14.2 C15.1 C16.2 C17.2 C18.2 C21.1 C22.1 C23.1 C24.1 C25.1 C26.1 C36.2 C37.1 C40.2 C41.2 D1.2 D3.2 D5.1 P2.2 Q1. Q1.5 Q1.6 Q1.7 Q1.8 Q2. Q2.5 Q2.6 Q2.7 Q2.8 R13.2 U1.4 U2.4 U4.3 | length 2.8
  Bottom Layer w0.254: v1(94.615,55.499) 94.615,54.631 R13.2@94.715,54.531 ; P2.2@109.645,60.115 P2.2 111.25,60.159 111.252,60.157 D5.1
VBAT_CONN: *.10 C27.2 C32.1 D8.1 L1.1 P2.1 P4.1 R8.2 | length 25
  Top Layer w0.254: v1(100.711,54.825) 100.711,55.956 R8.2 ; *.10 101.846,59.786 102.997,58.635 C32.1 104.013,58.675 v1(104.013,59.651) ; P2.1@109.569,58.127 P2.1
  Bottom Layer w0.254: v1(100.711,54.825) 108.077,54.825 109.623,56.371 109.623,57.017 109.601,57.039 P2.1 108.109,59.651 v1(104.013,59.651) ; P4.1 109.619,51.738 D8.1
VBUS: C33.2 J1.1 L2.1 U5.4 U5.5
pads on no net: *.5 J1.2 J1.3 J1.4 J1.6 J1.7 J1.8 J1.9 J1.10 J1.11

## Polygon pours and split planes (outlines as drawn)
VBAT on Top Layer "VBAT_L01_P104" (solid, pour order 104): 64.008,47.752 64.008,91.948 116.078,91.948 116.078,47.752
GND on Top Layer "Top Layer-GND" (solid, pour order 103): 83.185,53.467 86.868,53.467 86.868,55.118 88.773,55.118 88.773,56.261 86.614,56.261 86.614,56.515 83.185,56.515
GND on Top Layer "Top Layer-GND 1" (solid, pour order 92): 92.329,53.975 93.472,53.975 93.472,56.515 91.567,56.515 91.059,57.023 89.662,57.023 89.662,56.388 91.186,56.388 92.329,55.245
NetD7_2 on Top Layer "NETD7_2_L01_P089" (solid, pour order 89): 87.63,60.452 89.429,60.452 91.694,60.452 91.694,61.468 92.679,62.453 92.679,62.896 90.932,64.643 87.63,64.643
CHG_VBUS on Top Layer "CHG_VBUS_L01_P088" (solid, pour order 88): 92.075,60.198 94.234,60.198 94.996,60.96 96.52,60.96 96.901,60.579 98.552,60.579 98.552,60.96 97.155,62.357 97.155,65.659 92.075,65.659 92.075,63.754 92.71,63.119 92.71,62.103 92.075,61.468
3V3 on Top Layer "Top Layer-3V3" (solid, pour order 100): 64.008,56.261 75.819,56.261 75.819,54.229 77.851,54.229 77.851,59.182 75.057,59.182 75.057,59.563 65.913,59.563 65.913,66.509 68.199,66.509 68.199,69.303 70.993,69.303 70.993,70.446 69.215,70.446 68.707,70.954 65.532,70.954 65.532,69.049 64.008,69.049
GND on Top Layer "GND_L01_P099" (solid, pour order 99): 75.565,56.007 75.565,53.721 70.485,53.721 70.485,55.88 70.358,56.007
GND on Top Layer "GND_L01_P098" (solid, pour order 98): 75.184,59.309 78.867,59.309 78.867,63.627 75.184,63.627
NetR16_1 on Top Layer "NETR16_1_L01_P087" (solid, pour order 87): 89.54,58.134 89.54,57.282 89.535,57.277 91.567,57.277 91.567,56.642 93.98,56.642 93.98,59.944 89.535,59.944 89.535,58.166
VBUS on Top Layer "VBUS_L01_P086" (solid, pour order 86): 88.392,51.435 88.392,53.721 89.408,53.721 89.408,64.643 83.058,64.643 83.058,56.769 86.868,56.769 86.868,56.388 88.9,56.388 88.773,56.261 88.773,54.737 87.503,54.737 87.503,51.435
GND on Top Layer "GND_L01_P015" (solid, pour order 15): 91.059,65.747 100.203,65.747 100.203,69.176 100.076,69.303 91.059,69.303
CAP+ on Top Layer "CAP+_L01_P068" (solid, pour order 68): 94.742,122.77 106.299,134.327 113.284,134.327 113.284,126.707 107.315,126.707 100.33,119.722 100.33,113.372 94.742,113.372
NetC4_1 on Top Layer "Top Layer-NetC4_1" (solid, pour order 64): 68.707,109.181 110.617,109.181 110.617,115.658 105.791,115.658 105.791,112.102 88.9,112.102 84.836,116.166 68.707,116.166
NetC42_1 on Top Layer "NETC42_1_L01_P084" (solid, pour order 84): 71.374,63.842 73.406,63.842 73.406,67.906 69.469,67.906 69.469,66.89 71.374,66.89
GND on Top Layer "GND_L01_P031" (solid, pour order 31): 99.06,59.27 99.06,56.984 98.806,56.73 98.044,56.73 98.044,55.46 99.441,55.46 99.441,59.27
VBAT on Top Layer "VBAT_L01_P014" (solid, pour order 14): 70.104,83.527 70.104,74.256 66.929,74.256 66.929,76.415 64.135,76.415 64.135,78.447 69.088,78.447 69.342,78.701 69.342,83.527
GND on Top Layer "GND_L01_P079" (solid, pour order 79): 81.28,77.177 99.314,77.177 99.314,73.494 81.28,73.494
PRIMARY_H on Top Layer "Top Layer-PRIMARY_H" (solid, pour order 51): 85.852,79.971 85.852,93.052 79.121,93.052 79.121,83.019 75.311,83.019 72.517,80.225 72.517,77.685 73.406,77.685 73.406,78.955 74.422,79.971
VBAT_CONN on Top Layer "Top Layer-VBAT_CONN" (solid, pour order 45): 105.283,50.888 115.189,50.888 115.189,72.351 110.363,72.351 110.363,70.446 110.363,58.889 108.712,58.889 108.712,57.238 110.363,57.238 110.363,52.666 105.283,52.666
GND on Top Layer "GND_L01_P065" (solid, pour order 65): 68.453,71.208 68.453,73.367 66.675,73.367 66.675,76.034 64.262,76.034 64.262,71.208
NetD2_2 on Top Layer "NETD2_2_L01_P061" (solid, pour order 61): 89.281,118.579 91.567,118.579 93.726,116.42 93.726,114.388 89.281,114.388
PRIMARY_L on Top Layer "Top Layer-PRIMARY_L" (solid, pour order 53): 93.218,79.844 103.759,79.844 107.315,83.4 107.315,85.813 106.553,85.813 106.553,84.162 105.283,82.892 100.076,82.892 100.076,92.925 93.218,92.925
Net*_13 on Top Layer "NET*_13_L01_P042" (solid, pour order 42): 100.711,66.001 102.87,66.001 102.87,68.414 100.711,68.414
VBAT on Top Layer "VBAT_L01_P041" (solid, pour order 41): 105.283,62.191 105.283,60.032 107.823,60.032 108.585,59.27 110.236,59.27 110.236,62.191
Net*_15 on Top Layer "NET*_15_L01_P025" (solid, pour order 25): 99.06,61.048 99.06,62.826 100.584,64.35 100.584,65.747 103.124,65.747 103.124,70.192 107.569,70.192 107.569,64.223 101.346,64.223 99.441,62.318 99.441,61.048
GND on Top Layer "GND_L01_P038" (solid, pour order 38): 64.008,90.639 69.342,90.639 69.342,87.972 64.008,87.972
GND on Top Layer "GND_L01_P037" (solid, pour order 37): 110.744,75.526 116.078,75.526 116.078,72.859 110.744,72.859
Net*_9 on Top Layer "NET*_9_L01_P035" (solid, pour order 35): 100.457,59.524 101.6,59.524 102.743,58.381 102.743,57.111 101.6,57.111 100.457,58.254 100.457,59.016
Net*_9 on Top Layer "NET*_9_L01_P034" (solid, pour order 34): 101.6,55.333 101.6,57.238 104.775,57.238 104.775,59.27 106.426,59.27 106.426,56.73 104.902,56.73 104.902,55.333
GND on Top Layer "GND_L01_P030" (solid, pour order 30): 100.203,61.048 100.203,60.032 105.029,60.032 105.029,62.191 103.632,62.191 102.489,61.048
GND on Top Layer "GND_L01_P018" (solid, pour order 18): 70.937,69.054 68.458,69.054 68.453,69.049 68.453,66.509 65.786,66.509 65.786,62.103 71.247,62.103 71.247,66.636 69.215,66.636 69.215,68.287 70.993,68.287 70.993,69.049 70.941,69.049 70.935,69.055
GND on Top Layer "GND_L01_P013" (solid, pour order 13): 64.516,78.701 69.342,78.701 69.342,83.146 64.516,83.146
NetC2_1 on Top Layer "NetC1_1" (solid, pour order 12): 78.613,83.146 73.914,83.146 73.914,87.591 77.47,87.591 78.613,86.448
VBAT on Top Layer "VBAT_L01_P011" (solid, pour order 11): 64.008,87.718 73.025,87.718 73.025,85.559 72.263,84.797 72.263,83.273 64.008,83.273
VBAT on Top Layer "VBAT_L01_P008" (solid, pour order 8): 109.982,79.844 109.982,89.115 112.903,89.115 112.903,86.956 115.697,86.956 115.697,84.924 110.744,84.924 110.617,84.797 110.617,79.844
GND on Top Layer "GND_L01_P007" (solid, pour order 7): 110.998,80.352 115.824,80.352 115.824,84.797 110.998,84.797
NetC1_1 on Top Layer "NetC1_1" (solid, pour order 5): 101.6,79.59 106.299,79.59 106.299,75.78 102.743,75.78 101.6,76.923
VBAT on Top Layer "VBAT_L01_P004" (solid, pour order 4): 107.061,75.78 107.061,78.066 107.823,78.828 107.823,80.098 116.078,80.098 116.078,75.78
VBAT on Top Layer "VBAT_L01_P003" (solid, pour order 3): 91.694,82.765 91.694,79.971 87.376,79.971 87.376,82.765
GND on Top Layer "GND_L01_P002" (solid, pour order 2): 91.44,87.083 91.44,84.416 87.122,84.416 87.122,87.083
GND on Bottom Layer "GND_L02_P102" (solid, pour order 102): 64.008,47.752 64.008,135.763 116.078,135.763 116.078,47.752
NetD2_2 on Bottom Layer "NETD2_2_L02_P062" (solid, pour order 62): 99.695,103.339 89.408,103.339 89.408,118.706 91.694,118.706 94.107,116.293 94.107,107.53 99.695,107.53
NetC4_1 on Bottom Layer "NETC4_1_L02_P060" (solid, pour order 60): 110.516,123.417 110.49,123.391 110.49,110.07 105.791,110.07 105.791,123.405 110.49,123.405
NetC4_1 on Bottom Layer "NETC4_1_L02_P056" (solid, pour order 56): 68.808,110.376 68.834,110.402 68.834,123.723 73.533,123.723 73.533,110.388 68.834,110.388

## Silkscreen, mask and mechanical layers (free items; w line width, h text height)
Top Overlay:
  text "CAUTION" at 82.296,124.994 h5
  text "HIGH VOLTAGE" at 77.978,120.422 h5
  text "SHUNT" at 99.721,79.59 h2 r270
  text "SHUNT" at 80.492,74.891 h2 r90
  text "HVDC" at 85.09,69.749 h5

## Text inside footprints (layer, text, board x,y; h text height)
J1: Mechanical 1 "PCB EDGE" at 82.081,47.861 h1
T1: Top Overlay "PRIMARY" at 95.504,88.607 h1 r180; Top Overlay "SECONDARY" at 97.917,108.407 h1 r180
U1: Top Overlay "*" at 105.297,78.887 h1 r90; Mechanical 13 "*" at 106.529,80.271 h1 r90
U2: Top Overlay "*" at 74.727,84.602 h1 r270; Mechanical 13 "*" at 73.495,83.218 h1 r270
U3: Top Overlay "*" at 69.602,71.64 h1; Mechanical 13 "*" at 70.968,70.459 h1